# Altium PCB EM.PcbDoc
Units mm, origin at the board's own origin, x right, y up, seen from the top; angles counter-clockwise.
Board outline 249.38 x 15.25 mm, 2 copper layers (Top Layer, Bottom Layer); 56 components, 33 nets, 133 pads, 18 vias.
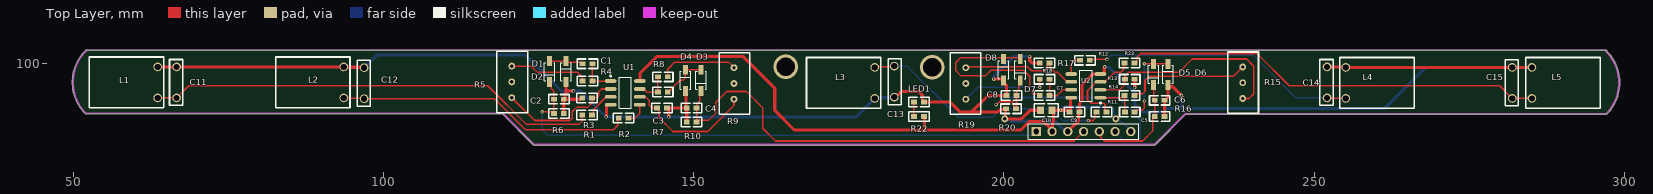
[diagram p0: Top Layer view]
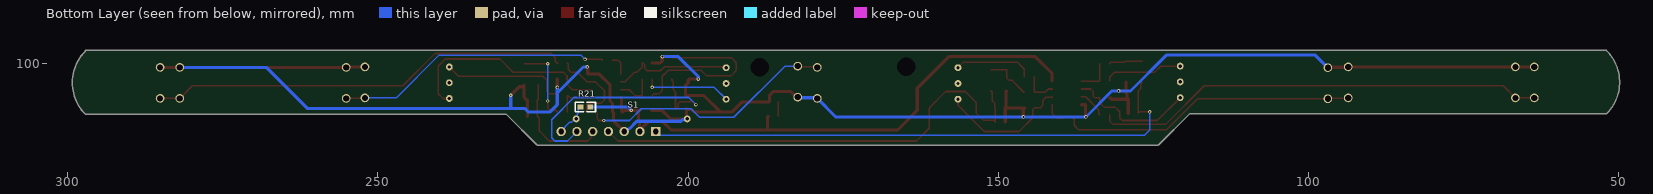
[diagram p1: Bottom Layer view, seen from below]

## Layer stack, top to bottom
Top Solder: solder mask 0.0102, Solder Resist, Dk 3.5
Top Layer: signal copper 0.0356
Dielectric 1: dielectric 0.32, FR-4, Dk 4.8
Bottom Layer: signal copper 0.0356
Bottom Solder: solder mask 0.0102, Solder Resist, Dk 3.5

## Board outline
119.2,91.854 124.163,86.891 124.162,86.891 ccw(c124.253,86.981) 124.253,86.854 224.32,86.854 ccw(c224.32,86.981) 224.411,86.891 224.41,86.891 229.295,91.776 ccw(c229.32,91.901) 229.32,91.774 297.053,91.774 ccw(c297.053,91.901) 297.143,91.811 ccw(c292.053,96.901) 299.251,96.901 ccw(c292.053,96.901) 297.191,101.942 ccw(c297.07,101.981) 297.197,101.981 ccw(c297.07,101.981) 297.07,102.108 52.07,102.108 ccw(c52.07,101.981) 51.98,102.071 ccw(c57.07,96.981) 51.98,91.891 ccw(c52.07,91.981) 52.098,91.857 52.097,91.857 ccw(c52.125,91.981) 52.125,91.854

## Design rules (kind name [scope] priority, off if disabled: settings)
Clearance Clearance_1 [InNetClass('3PWR')] p1: gap=0.508 ignorepadtopadclearanceinfootprint=TRUE
Clearance [All] p2: gap=0.254 ignorepadtopadclearanceinfootprint=TRUE except(0: Arc-Hole Track-Hole SMDPad-Hole THPad-Hole Via-Hole Fill-Hole Poly-Hole Region-Hole Text-Hole)
MinimumSolderMaskSliver [All] p1: minsoldermaskwidth=0.051
PlaneConnect [All] p1: planeconnectstyle=Direct reliefexpansion=0.508 reliefentries=4 reliefconductorwidth=0.254 reliefairgap=0.254
PolygonConnect [All] p1: connectstyle=Direct reliefconductorwidth=0.254 reliefentries=4 polygonreliefangle="90 Angle" airgapwidth=0.254
RoutingVias [All] p1: holewidth=0.305 width=0.559 viastyle="Through Hole" minholewidth=0.305 minwidth=0.559 maxholewidth=0.305 maxwidth=0.559
SilkToSilkClearance [All] p1: silktosilkclearance=0.051
SilkToSolderMaskClearance [IsPad] p1: minsilkscreentomaskgap=0.051 clearancetoexposedcopper=TRUE
SolderMaskExpansion [All] p1: expansion=0.102
Width [InNetClass('3PWR')] p1: maxlimit=0.508 minlimit=0.508 preferedwidth=0.508
Width Width_1 [All] p2: maxlimit=0.254 minlimit=0.254 preferedwidth=0.254
26 further rules are at their usual default settings.

## Classes and differential pairs
net class 3PWR: A3V3 AGND

## Components (designator, comment, footprint, x,y, rotation, side; value= is the part's Value field where it differs from the comment)
C1 "Cap" 0603C 132.889,99.949 r180 top value=104
C2 "Cap" 0603C 128.285,94.234 r0 top value=104
C3 "Cap" 0603C 145.034,95.377 r0 top value=104
C4 "Cap" 0603C 149.694,92.837 r180 top value=104
C5 "Cap" 0603C 220.298,92.202 r0 top value=104
C6 "Cap" 0603C 225.124,94.065 r0 top value=104
C7 "Cap" 0603C 206.582,94.827 r180 top value=104
C8 "Cap" 0603C 201.248,94.827 r180 top value=104
C9 "Cap" 0603C 211.408,92.202 r180 top value=104
C10 "Cap" 0805 206.836,92.456 r0 top value=106
C11 "Cap" CAP2 66.675,99.441 r270 top value=6.2nF
C12 "Cap" CAP2 96.901,99.314 r270 top value=6.2nF
C13 "Cap" CAP2 182.344,94.568 r90 top value=6.2nF
C14 "Cap" CAP2 252.095,99.441 r270 top value=6.2nF
C15 "Cap" CAP2 281.94,99.361 r270 top value=6.2nF
D1 "1N4148" SOD123 126.793,100.33 r270 top
D2 "1N4148" SOD123 129.46,97.028 r90 top
D3 "1N4148" SOD123 151.218,98.933 r270 top
D4 "1N4148" SOD123 148.678,95.631 r90 top
D5 "1N4148" SOD123 224.155,99.871 r270 top
D6 "1N4148" SOD123 226.441,96.569 r90 top
D7 "1N4148" SOD123 202.645,100.633 r270 top
D8 "1N4148" SOD123 199.978,97.331 r90 top
L1 "Inductor" L2 63.627,99.441 r270 top value=10mH
L2 "Inductor" L2 93.627,99.441 r270 top value=10mH
L3 "Inductor" L2 179.197,99.361 r270 top value=10mH
L4 "Inductor" L2 255.115,94.361 r90 top value=10mH
L5 "Inductor" L2 285.115,94.361 r90 top value=10mH
LED1 "0" 0603C 186.309,93.802 r0 top
P1 "Header 7" HDR1X7 205.232,89.027 r0 top
R1 "Res2" 0603C 132.842,91.694 r0 top value=5.1k
R2 "Res2" 0603C 138.731,91.186 r0 top value=5.1k
R3 "Res2" 0603C 132.842,94.446 r0 top value=1k
R4 "Res2" 0603C 132.889,97.197 r0 top value=47k
R5 "Res2" W102/3296W 120.697,97.028 r90 top value=100k
R6 "Res2" 0603C 128.285,91.948 r0 top value=47k
R7 "Res2" 0603C 144.907,92.837 r180 top value=1k
R8 "Res2" 0603C 145.034,97.85 r180 top value=47k
R9 "Res2" W102/3296W 156.511,96.774 r90 top value=100k
R10 "Res2" 0603C 149.694,90.551 r180 top value=47k
R11 "Res2" 0603C 215.726,92.202 r0 top value=5.1k
R12 "Res2" 0603C 213.059,100.51 r180 top value=5.1k
R13 "Res2" 0603C 220.298,97.451 r180 top value=1k
R14 "Res2" 0603C 220.266,94.827 r180 top value=47k
R15 "Res2" W102/3296W 238.506,96.893 r90 top value=100k
R16 "Res2" 0603C 225.124,91.44 r0 top value=47k
R17 "Res2" 0603C 206.582,100.076 r0 top value=1k
R18 "Res2" 0603C 206.582,97.451 r0 top value=47k
R19 "Res2" W102/3296W 193.882,96.774 r270 top value=100k
R20 "Res2" 0603C 201.168,92.697 r180 top value=47k
R21 "Res2" 0603C 216.583,92.964 r180 bottom value=10k
R22 "Res2" 0603R 186.309,91.463 r0 top value=2.2k
R23 "Res2" 0603C 220.266,100.076 r180 top value=5.1k
S1 "SW-SPST" SW_REED 200.152,90.932 r0 bottom
U1 "OPA2350" SO8_L 138.985,95.25 r0 top
U2 "OPA2350" SO8_L 213.218,96.393 r180 top

## Footprints (in the part's own frame and the unit in brackets; to place one, negate y for a bottom-side part, rotate by r counter-clockwise, add the part's x,y. Pads: shape width x height; smd on the part's side, far side on the other; paste and mask are expansions set on the pad)
0603C [mil]
  rect 37.5x31 smd: 1(-31.25,0) 2(31.25,0)
  silkscreen extent -65,-30 65,30
0603R [mil]
  rect 37.5x31 smd: 1(-31.25,0) 2(31.25,0)
  silkscreen extent -65,-30 65,30
0805 [mil]
  rect 45x50 smd: 1(-37.5,0) 2(37.5,0)
  silkscreen extent -75,-40 75,40
CAP2 [mm]
  round 1.4 hole 1: 1(0,0) 2(5,0)
  silkscreen extent -1.2,-1.14 6.2,1
HDR1X7 [mm] "Connector; Header; 7 Position"
  rect 1.5x1.5 hole 0.9: 1(0,0)
  round 1.5 hole 0.9: 2(2.54,0) 3(5.08,0) 4(7.62,0) 5(10.16,0) 6(12.7,0) 7(15.24,0)
  silkscreen extent -1.27,-1.27 16.51,1.27
L2 [mm]
  round 1.4 hole 1: 1(0,0) 2(5,0)
  silkscreen extent -1.6,-11 6.6,1
SO8_L [mm] "SOIC, 8-Leads, Body 4.9x3.9mm, Pitch 1.27mm, IPC High Density"
  oval 1.9x0.6 smd: 1(-2.35,1.905) 2(-2.35,0.635) 3(-2.35,-0.635) 4(-2.35,-1.905) 5(2.35,-1.905) 6(2.35,-0.635) 7(2.35,0.635) 8(2.35,1.905)
  silkscreen extent -2.47,-2.5 1,2.88, body extent -2,-2.5 2,2.5, height 1.75
SOD123 [mm]
  rect 1.6x0.8 smd: 1(-0.049,0) 2(3.351,0)
  silkscreen extent 0.2,-0.85 3.1,0.85
SW_REED [mm]
  round 1.1 hole 0.55: 1(0,-0.127) 2(17.907,-0.127)
W102/3296W [mm]
  round 1.1 hole 0.55: 1(-2.54,0) 2(0,0) 3(2.54,0)
  silkscreen extent -4.95,-2.55 4.95,2.41

## Part data
C1 C2 C3 C4 C5 C6 C7 C8 C9 C10 C11 C12 C13 C14 C15: "Capacitor", LatestRevisionDate=17-Jul-2002, LatestRevisionNote="Re-released for DXP Platform.", PackageDescription="Radial Cap, Thru-Hole; 2 Leads; 0.3 in Pin Spacing", PackageReference=RAD-0.3, Published=8-Jun-2000, Publisher="Altium Limited"
D1 D2 D3 D4 D5 D6 D7 D8: library part Diode_2, "Default Diode", Code_JEDEC=DO-214-AB, LatestRevisionDate=17-Jul-2002, LatestRevisionNote="Re-released for DXP Platform.", PackageDescription="DO-214-AB/SMC; 2 C-Bend Leads; Body 7.9 x 5.9 mm, inc. leads (LxW)", PackageReference=SMC, PackageVersion=Sep-1996, Published=8-Jun-2000, Publisher="Altium Limited"
L1 L2 L3 L4 L5: library part Inductor_2, Code_IEC=1005, Code_JEITA=0402, LatestRevisionDate=29-May-2009, LatestRevisionNote="IPC-7351 Footprint Added.", PackageDescription="Chip Inductor", PackageReference=0402-A, Published=8-Jun-2000, Publisher="Altium Limited"
LED1: library part LED2, "Typical RED, GREEN, YELLOW, AMBER GaAs LED", LatestRevisionDate=17-Jul-2002, LatestRevisionNote="Re-released for DXP Platform.", PackageDescription="SM LED; 2 Flat Leads", PackageReference=3.2X1.6X1.1, PackageVersion=Feb-2002, Published=8-Jun-2000, Publisher="Altium Limited"
P1: "Header, 7-Pin", LatestRevisionDate=17-Jul-2002, LatestRevisionNote="Re-released for DXP Platform.", Publisher="Altium Limited"
R1 R2 R3 R4 R6 R7 R8 R10 R11 R12 R13 R14 R16 R17 R18 R20 R21 R22 R23: "Resistor", LatestRevisionDate=17-Jul-2002, LatestRevisionNote="Re-released for DXP Platform.", PackageDescription="Axial Device, Thru-Hole; 2 Leads; 0.4 in Pin Spacing", PackageReference=AXIAL-0.4, Published=8-Jun-2000, Publisher="Altium Limited"
R5 R9 R15 R19: library part RP, "Resistor", LatestRevisionDate=17-Jul-2002, LatestRevisionNote="Re-released for DXP Platform.", PackageDescription="Axial Device, Thru-Hole; 2 Leads; 0.4 in Pin Spacing", PackageReference=AXIAL-0.4, Published=8-Jun-2000, Publisher="Altium Limited"
S1: "Single-Pole, Single-Throw Switch", LatestRevisionDate=17-Jul-2002, LatestRevisionNote="Re-released for DXP Platform.", PackageDescription="Switch; 2 Leads", PackageReference=SPST-2, Published=24-Mar-1999, Publisher="Altium Limited"

## Via types
v1: diameter 0.559, hole 0.305, Top Layer to Bottom Layer, tented both sides, 16 vias
v2: diameter 4/0.559 (per signal layer), hole 3, Top Layer to Bottom Layer, 2 vias

## Nets (pads, with @x,y where several pads share a name; then routed paths per layer and width w, separated by ;. In a path a pad name is that pad's centre, name@x,y a point inside that pad or via, vN(x,y) a via of type N, cw(c..) or ccw(c..) an arc to the next point about the centre after c; other vN are vias at no path point)
A3V3: C9.2 C10.2 P1.2 R21.2 R22.2 U1.8 U2.8 | length 95.4
  Top Layer w0.508: U1.8 141.335,98.377 144.063,101.105 157.988,101.105 163.068,96.025 163.068,92.456 166.243,89.281 187.198,89.281 ; R22.2 187.198,91.368 187.198,89.281 ; U2.8 210.783,94.488 210.741,94.446 210.741,92.329 C9.2 210.532,92.202 210.278,92.456 C10.2 207.979,92.266 207.979,90.665 207.853,90.539 207.853,89.108 P1.2 207.772,89.293 206.439,90.627 204.089,90.627 202.743,89.281 187.198,89.281
  Bottom Layer w0.508: P1.2@207.582,89.217 P1.2 ; v1(209.169,92.456) 209.677,92.964 R21.2
AGND: C2.2 C4.2 C6.2 C8.2 C9.1 C10.1 C11.1 C12.1 C13.1 C14.1 C15.1 D2.1 D4.1 D6.1 D8.1 L1.1 L2.1 L3.2 L4.2 L5.2 LED1.2 P1.3 R3.1 R6.2 R7.1 R10.2 R13.1 R16.2 R17.1 R20.2 S1.1 U1.4 U2.4 | length 339.4
  Top Layer w0.508: L1.1 C11.1 L2.1 93.691,99.377 96.837,99.377 C12.1 ; R6.2 C2.2 C2.2@129.162,94.234 ; D2.1 129.46,95.758 ; v1(130.615,95.562) 129.656,95.562 129.46,95.758 ; R3.1 131.966,94.446 131.754,94.234 C2.2@129.162,94.234 ; v1(135.89,91.376) 135.967,91.454 135.967,93.303 136.01,93.345 U1.4 ; R7.1 R7.1@145.783,92.837 ; v1(145.987,91.376) 145.987,92.551 145.923,92.615 145.923,92.697 R7.1@145.783,92.837 ; D4.1 148.789,95.471 C4.2@148.789,92.948 ; R10.2 C4.2 C4.2@148.789,92.948 ; C13.1 182.585,94.568 183.492,95.474 186.309,95.474 186.88,94.903 186.88,93.942 187.02,93.802 LED1.2 191.313,93.802 192.913,92.202 194.86,92.202 ; v1(198.374,97.487) 199.832,97.487 199.978,97.341 D8.1 199.978,96.882 200.454,96.406 C8.2 197.485,94.827 194.86,92.202 ; R20.2 R20.2@200.263,92.586 ; v1(204.169,101.092) 204.169,100.432 204.525,100.076 R17.1 ; C10.1 204.243,92.456 202.846,91.059 S1.1 200.263,91.17 R20.2@200.263,92.586 ; P1.3 212.063,90.778 212.063,92.063 C9.1 212.202,93.55 212.598,93.946 212.598,96.567 214.311,98.28 215.55,98.28 U2.4 216.147,98.298 216.189,98.34 216.189,99.36 v1(216.27,99.441) ; v1(221.092,96.139) R13.1 ; R16.2 C6.2 226,94.065 226.441,94.505 D6.1@226.441,96.395 ; D6.1 D6.1@226.441,96.395 ; v1(228.6,94.869) 227.22,96.249 226.587,96.249 D6.1@226.441,96.395 ; C14.1 252.135,99.401 255.075,99.401 L4.2 C15.1 L5.2 ; C2.2@129.162,94.234 129.301,94.374 129.301,95.178 129.46,95.337 129.46,95.758 ; R7.1@145.783,92.837 148.678,92.837 C4.2@148.789,92.948 ; 194.86,92.202 199.062,92.202 199.417,92.558 200.235,92.558 R20.2@200.263,92.586
  Bottom Layer w0.508: C12.1 98.933,101.346 122.936,101.346 128.72,95.562 v1(130.615,95.562) 130.621,95.569 131.697,95.569 v1(135.89,91.376) v1(145.987,91.376) 176.213,91.376 L3.2 179.3,94.464 182.24,94.464 C13.1 ; v1(198.374,97.487) 198.374,97.894 201.572,101.092 v1(204.169,101.092) ; S1.1 200.265,90.946 200.9,90.946 201.168,90.678 208.259,90.678 209.513,89.424 209.646,89.424 210.044,89.027 P1.3 ; v1(216.27,99.441) 216.28,99.431 216.882,99.431 220.98,95.333 ; v1(221.092,96.139) 221.092,93.36 222.25,92.202 225.806,92.202 226.365,92.761 228.6,92.761 ; v1(228.6,94.869) 228.6,92.761 ; C15.1 268.017,99.361 261.417,92.761 228.6,92.761
IN1: C11.2 L1.2 R1.1 | length 73.1
  Top Layer w0.254: L1.2 C11.2 68.627,96.393 116.84,96.393 123.063,90.17 131.54,90.17 132.08,90.71 132.08,91.662 R1.1
IN2: C12.2 L2.2 R2.1 | length 47.8
  Top Layer w0.254: L2.2 93.691,94.377 96.837,94.377 C12.2 117.903,94.314 122.936,89.281 137.033,89.281 137.795,90.043 137.795,91.044 R2.1
IN3: C13.2 L3.1 R11.1 | length 41.7
  Top Layer w0.254: L3.1 179.3,99.465 182.24,99.465 C13.2 ; v1(213.614,90.805) 214.376,90.805 214.63,91.059 214.63,91.935 214.897,92.202 R11.1
  Bottom Layer w0.254: C13.2 184.404,99.568 192.659,91.313 198.173,91.313 199.557,92.697 207.547,92.697 209.439,90.805 v1(213.614,90.805)
IN4: C14.2 L4.1 R12.1 | length 44.5
  Top Layer w0.254: R12.1 214.01,100.667 v1(216.618,100.667) ; C14.2 252.135,94.401 255.075,94.401 L4.1
  Bottom Layer w0.254: v1(216.618,100.667) 217.297,101.346 240.157,101.346 247.062,94.441 C14.2
IN5: C15.2 L5.1 R23.1 | length 68
  Top Layer w0.254: R23.1 221.143,100.076 221.409,100.343 221.409,100.939 222.07,101.6 240.792,101.6 245.999,96.393 279.908,96.393 C15.2 L5.1
NetC1_1: C1.1 R4.2 U1.1 | length 5.7
  Top Layer w0.254: C1.1 R4.2 133.725,97.155 U1.1
NetC1_2: C1.2 D1.1 D2.2 | length 5.5
  Top Layer w0.254: D1.1 D2.2 129.623,100.216 131.829,100.216 C1.2
NetC3_1: C3.1 R8.2 U1.7 | length 5.6
  Top Layer w0.254: U1.7 141.985,95.885 142.493,95.377 C3.1 R8.2
NetC3_2: C3.2 D3.1 D4.2 | length 7.7
  Top Layer w0.254: C3.2 145.91,95.377 147.815,97.282 148.297,97.282 148.678,97.663 D4.2 D3.1
NetC5_1: C5.1 R14.2 U2.1 | length 6.7
  Top Layer w0.254: U2.1 219.051,94.488 219.39,94.827 R14.2 219.472,92.234 C5.1
NetC5_2: C5.2 D5.1 D6.2 | length 12.7
  Top Layer w0.254: C5.2 221.358,92.469 222.263,92.469 222.631,92.837 v1(222.631,93.946) ; v1(222.631,99.949) 224.126,99.949 D5.1 D6.2
  Bottom Layer w0.254: v1(222.631,93.946) v1(222.631,99.949)
NetC7_1: C7.1 R18.2 U2.7 | length 6.5
  Top Layer w0.254: R18.2 C7.1 208.572,94.827 209.503,95.758 U2.7
NetC7_2: C7.2 D7.1 D8.2 | length 29.3
  Top Layer w0.254: D7.1@202.645,100.887 199.978,100.887 192.993,100.887 192.231,100.125 192.231,98.848 193.035,98.044 197.057,98.044 197.935,98.922 203.164,98.922 204.169,97.917 204.169,95.631 204.707,95.093 205.522,95.093 C7.2
NetLED1_1: LED1.1 R22.1 | length 2.3
  Top Layer w0.254: R22.1 LED1.1
NetR1_2: R1.2 U1.3 | length 4.6
  Top Layer w0.254: R1.2 133.794,91.853 133.794,92.477 135.933,94.615 U1.3
NetR2_2: R2.2 U1.5 | length 3.5
  Top Layer w0.254: R2.2 139.537,91.199 140.571,91.199 140.812,91.44 ; 140.812,91.441 141.351,91.98 141.351,93.329 U1.5
NetR3_2: R3.2 R5.1 U1.2 | length 21.1
  Top Layer w0.254: R5.1 124.38,90.805 130.071,90.805 130.429,91.163 130.429,92.202 131.191,92.964 132.969,92.964 133.683,93.678 133.683,94.399 R3.2 134.451,94.446 134.747,94.742 134.747,95.474 135.158,95.885 U1.2
NetR4_1: R4.1 R5.3 | length 12.7
  Top Layer w0.254: R5.3 123.825,99.568 124.841,98.552 131.321,98.552 132.08,97.793 132.08,97.213 R4.1
NetR7_2: R7.2 R9.1 U1.6 | length 21.4
  Top Layer w0.254: U1.6 141.401,94.549 142.319,94.549 142.875,93.993 142.875,93.218 143.256,92.837 R7.2 144.196,92.837 144.463,92.57 144.463,91.249 146.685,89.027 152.273,89.027 156.511,93.265 R9.1
NetR8_1: R8.1 R9.3 | length 12.7
  Top Layer w0.254: R8.1 145.828,99.06 146.983,100.216 155.609,100.216 R9.3
NetR11_2: R11.2 R23.2 U2.3 | length 14.2
  Top Layer w0.254: R11.2 216.303,92.419 216.303,93.45 216.154,93.599 214.034,93.599 213.487,94.146 213.487,95.597 214.918,97.028 U2.3 216.27,97.028 217.798,98.556 218.825,98.556 219.314,99.045 219.314,99.917 R23.2
NetR12_2: R12.2 U2.5 | length 3.4
  Top Layer w0.254: U2.5 210.868,100.076 211.302,100.51 R12.2
NetR13_2: R13.2 R15.1 U2.2 | length 34.6
  Top Layer w0.254: U2.2 218.66,95.758 219.446,96.544 219.446,97.393 R13.2 219.529,97.476 219.529,97.985 220.095,98.552 228.184,98.552 230.343,100.711 239.141,100.711 240.284,99.568 240.284,95.123 239.514,94.353 R15.1
NetR14_1: R14.1 R15.3 | length 20.4
  Top Layer w0.254: R14.1 221.327,95.093 222.347,95.093 222.758,95.504 222.758,97.282 223.431,97.955 237.028,97.955 R15.3
NetR17_2: R17.2 R19.1 U2.6 | length 19.8
  Top Layer w0.254: R19.1 194.044,99.476 203.817,99.476 204.486,98.806 206.582,98.806 207.026,99.251 207.026,99.809 207.293,100.076 R17.2 207.376,99.473 208.292,98.556 208.689,98.556 210.218,97.028 U2.6
NetR18_1: R18.1 R19.3 | length 14
  Top Layer w0.254: v1(205.788,96.139) R18.1
  Bottom Layer w0.254: R19.3 195.787,96.139 v1(205.788,96.139)
OUT1: C2.1 D1.2 P1.1 R6.1 | length 90.4
  Top Layer w0.254: v1(125.603,92.202) 127.238,92.202 R6.1 C2.1 127.443,94.283 127.443,95.569 127.066,95.946 127.066,96.706 D1.2
  Bottom Layer w0.254: v1(125.603,92.202) 125.603,89.281 126.428,88.456 205.168,88.456 P1.1@205.359,88.646
OUT2: C4.1 D3.2 P1.4 R10.1 | length 76.6
  Top Layer w0.254: D3.2 151.003,95.367 151.003,93.993 150.622,93.612 150.622,92.971 C4.1 R10.1 150.754,90.818 152.413,90.818 153.543,91.948 153.543,93.684 155.334,95.474 158.516,95.474 161.163,92.827 161.163,89.535 163.195,87.503 211.328,87.503 P1.4
OUT3: C6.1 D5.2 P1.5 R16.1 | length 18
  Top Layer w0.254: P1.5 215.568,88.851 215.568,88.089 216.154,87.503 222.377,87.503 223.981,89.107 223.981,91.173 224.248,91.44 R16.1 C6.1 224.155,94.24 D5.2
OUT4: C8.1 D7.2 P1.6 R20.1 | length 42.2
  Top Layer w0.254: v1(198.755,93.368) 198.837,93.368 199.262,93.793 201.355,93.793 201.612,93.535 201.612,92.964 201.879,92.697 R20.1 ; R20.1@202.042,92.697 C8.1 202.042,95.377 202.372,95.707 202.372,97.009 D7.2 ; D7.2@202.542,97.384 D7.2@202.645,97.487
  Bottom Layer w0.254: v1(198.755,93.368) 199.892,94.505 218.423,94.505 221.996,90.932 221.996,88.011 221.488,87.503 219.456,87.503 P1.6
SW1: P1.7 R21.1 S1.2 | length 5.6
  Bottom Layer w0.254: R21.1 217.46,92.964 217.726,92.697 217.726,92.027 217.897,91.856 217.897,91.221 S1.2 218.288,91.059 218.796,90.551 219.075,90.551 220.472,89.154 P1.7
pads on no net: R5.2 R9.2 R15.2 R19.2
copper on no net:
  other v2: 188.46,99.385 164.846,99.465

## Keep-outs
Top Layer:
  lines w0.254: 52.07,91.981 cw(c57.07,96.981) 52.07,101.981 ; 52.07,102.108 297.07,102.108 ; 52.125,91.981 119.38,91.981 ; 119.253,91.981 124.253,86.981 124.32,86.981 224.32,86.981 229.32,91.981 ; 229.32,91.901 297.053,91.901 ccw(c292.053,96.901) 297.053,101.901

## Silkscreen, mask and mechanical layers (free items; w line width, h text height)
Mechanical 1:
  lines w0.254: 52.07,91.981 cw(c57.07,96.981) 52.07,101.981 ; 52.07,102.108 297.07,102.108 ; 52.125,91.981 119.38,91.981 ; 119.253,91.981 124.253,86.981 124.32,86.981 224.32,86.981 229.32,91.981 ; 229.32,91.901 297.053,91.901 ccw(c292.053,96.901) 297.053,101.901